# EAGLE board Servo MCU v1.4 (EAGLE 6.4)
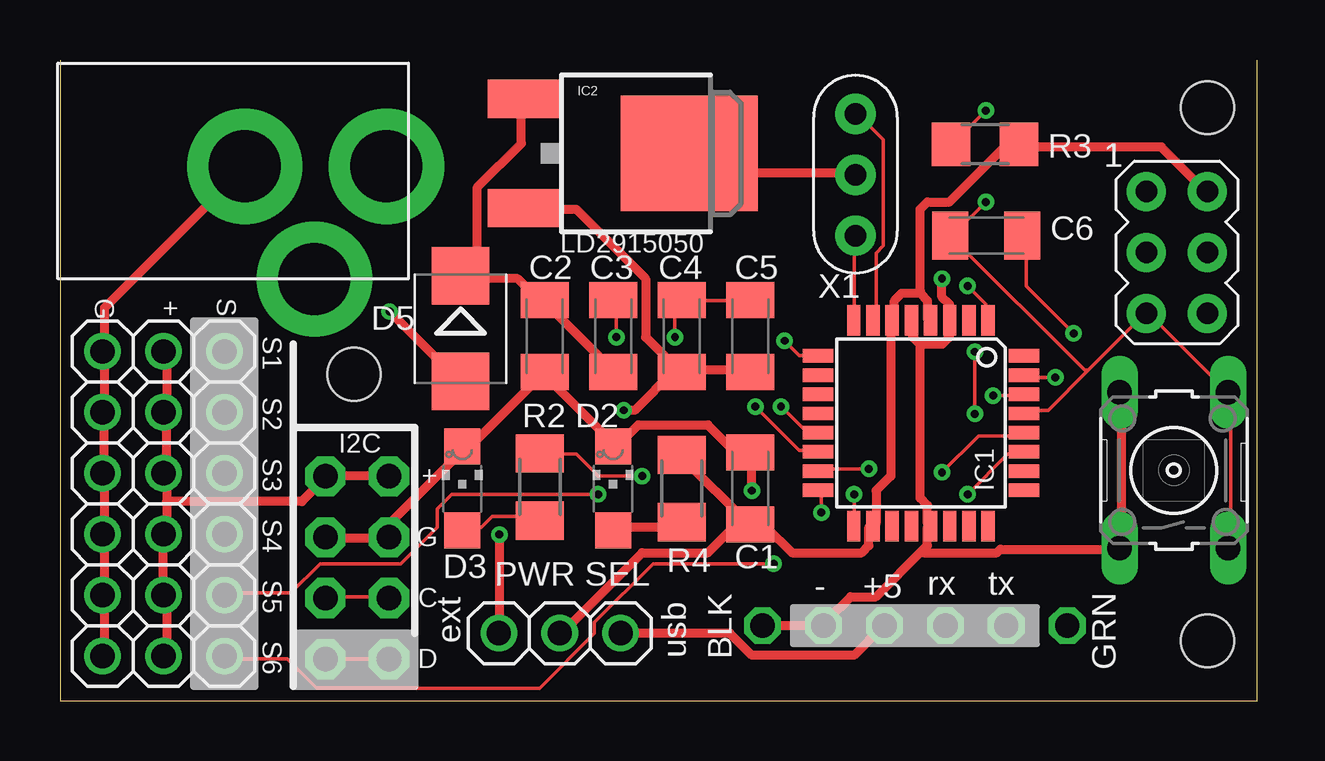
[diagram p0: board, top side]
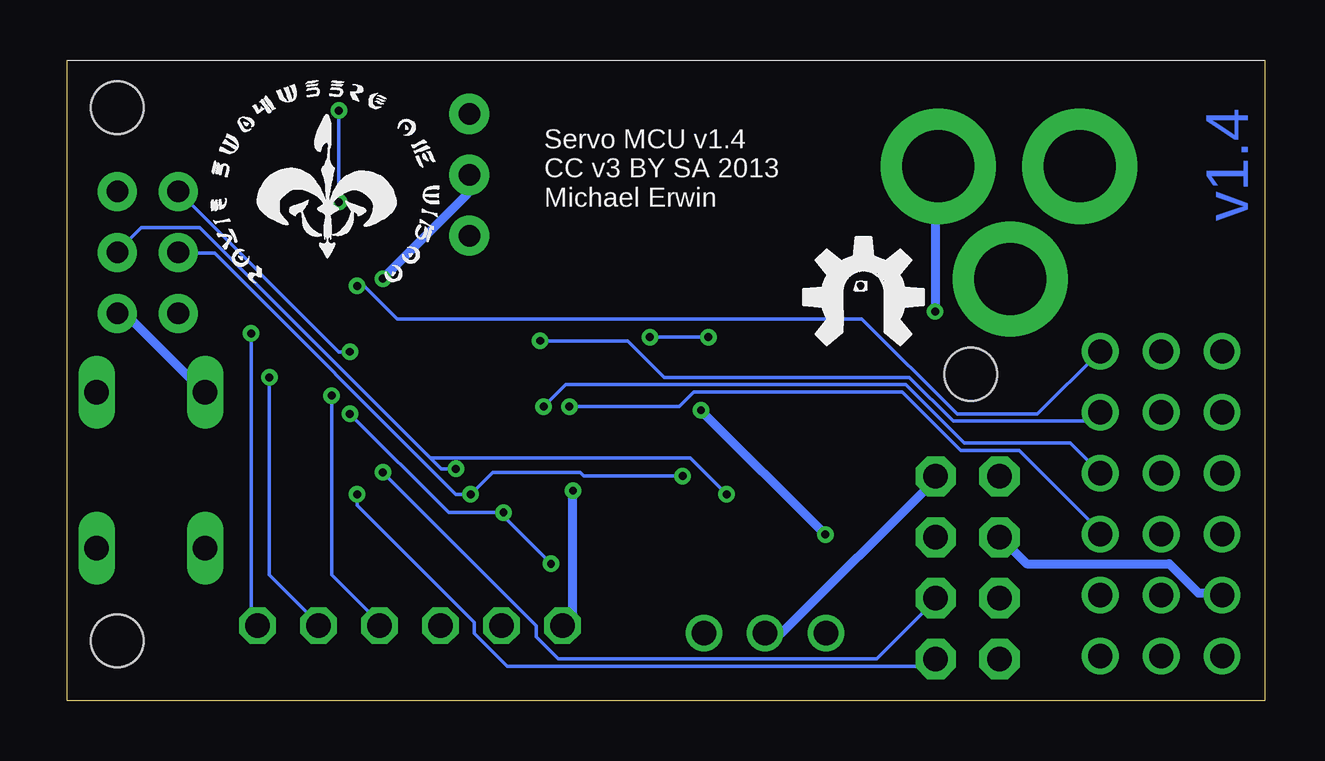
[diagram p1: board, bottom side, seen from below]

Size 49.89 x 26.72 mm. Coordinates in mm from the lower left corner, seen from the top.
Outline: 49.89,26.72 49.89,0 0,0 0,26.72
Copper layers (1*16): Top 0.0356mm / dielectric 1.5011mm / Bottom 0.0356mm
Design rules "LaenPCBOrder *": minimum track width 6mil, minimum drill 13mil, track to track 6mil, track to pad 6mil, pad to pad 6mil, via to via 12mil, smd to smd 6mil, copper to edge 15mil, drill to drill 6mil, minimum pad ring 7mil, minimum via ring 7mil, stop-mask expansion 4mil, vias tented up to drill 14mil, thermal gap 10mil
Net classes: 1 supply: width 0.381 mm, drill 0.152 mm, clearance 0.152 mm
Holes 2.2 mm at 47.81,2.5 47.81,24.73 12.25,13.61

## Footprints (pad centres in the part's own frame; a part is rotated, then mirrored left to right if it is on the bottom)
C1206K = smd 1.5 x 2: 1 -1.5,0; 2 1.5,0
CHIPLED_1206 = smd 1.5 x 1.5: A 0,-1.75; C 0,1.75
SMB = smd 2.4 x 2.4: A 2.2,0; C -2.2,0
1X04-CB = drill 1.016 pad 1.676 octagon: 1 -3.81,0; 2 -1.27,0; 3 1.27,0; 4 3.81,0
TQFP32-08 = smd 1.27 x 0.559: 1 -4.293,2.8; 2 -4.293,2; 3 -4.293,1.2; 4 -4.293,0.4; 5 -4.293,-0.4; 6 -4.293,-1.2; 7 -4.293,-2; 8 -4.293,-2.8; 17 4.293,-2.8; 18 4.293,-2; 19 4.293,-1.2; 20 4.293,-0.4; 21 4.293,0.4; 22 4.293,1.2; 23 4.293,2; 24 4.293,2.8 | smd 0.559 x 1.27: 9 -2.8,-4.293; 10 -2,-4.293; 11 -1.2,-4.293; 12 -0.4,-4.293; 13 0.4,-4.293; 14 1.2,-4.293; 15 2,-4.293; 16 2.8,-4.293; 25 2.8,4.293; 26 2,4.293; 27 1.2,4.293; 28 0.4,4.293; 29 -0.4,4.293; 30 -1.2,4.293; 31 -2,4.293; 32 -2.8,4.293
DPAK = smd 1.6 x 3: 1 -2.28,-5.31; 3 2.28,-5.31 | smd 4.826 x 5.715: 4 0,1.588
AVRISP = drill 0.9 pad 1.626: 1 -1.27,2.54; 2 1.27,2.54; 3 -1.27,0; 4 1.27,0; 5 -1.27,-2.54; 6 1.27,-2.54
PJ-102A = drill 3 pad 4.8: RING 0.1,-3.39; RING_SW -4.6,-6.29; TIP 0.1,-9.29
1X03 = drill 1.016: 1 -2.54,0; 2 0,0; 3 2.54,0
1X06-CLEAN = drill 1.016 octagon: 1 -6.35,0; 2 -3.81,0; 3 -1.27,0; 4 1.27,0; 5 3.81,0; 6 6.35,0
R1206 = smd 1.6 x 1.803: 1 -1.422,0; 2 1.422,0
M1206 = smd 1.6 x 2: 1 -1.4,0; 2 1.4,0
B3F-10XX = drill 1.016 long: 1 -3.251,2.261; 2 3.251,2.261; 3 -3.251,-2.261; 4 3.251,-2.261
CERM_OSC = drill 0.9 pad 1.676: P$1 -2.54,0; P$2 0,0; P$3 2.54,0

## Placement (x,y rotation side)
C1  0.1uF  [C1206K]  28.76,8.85 90 top
C2  0.1uF  [C1206K]  20.19,15.2 270 top
C3  10uf 25V  [C1206K]  23.05,15.2 90 top
C4  10uf 25V  [C1206K]  25.9,15.2 90 top
C5  0.1uF  [C1206K]  28.76,15.2 90 top
C6  0.1uF  [C1206K]  38.6,19.39 180 top
D2  [CHIPLED_1206]  23.05,8.85 0 top
D3  Green  [CHIPLED_1206]  16.76,8.85 0 top
D5  [SMB]  16.7,15.52 270 top
I2C  [1X04-CB]  11.06,5.55 90 top
I2C1  [1X04-CB]  13.71,5.55 90 top
IC1  MEGA48/88/168-AU  [TQFP32-08]  35.87,11.58 270 top
IC2  LM2931_FIXED  [DPAK]  24.63,22.82 270 top
ICSP  AVRISP-6  [AVRISP]  46.54,18.69 0 top
J2  2.1MMJACK  [PJ-102A]  4.31,22.19 90 top
JP1  [1X03]  4.31,14.57 180 top
JP2  [1X03]  4.31,12.03 180 top
JP3  [1X03]  4.31,9.49 180 top
JP4  [1X03]  4.31,6.95 180 top
JP5  [1X03]  4.31,4.41 180 top
JP6  [1X03]  4.31,1.87 180 top
JP7  [1X06-CLEAN]  35.62,3.14 0 top
PWR_SELECT  [1X03]  20.82,2.82 0 top
R1  10K  [R1206]  38.54,23.2 180 top
R3  1.0 K  [M1206]  20,8.92 270 top
R4  1.0 K  [M1206]  25.9,8.85 270 top
S1  RESET  [B3F-10XX]  46.41,9.61 90 top
U$2  RSERIES-OSHW-LOGOMEDIUM  [RSERIES-OSHW-LOGO-MEDIUM]  16.82,16.88 0 bottom
U$3  ROYAL-ENGINEERS-OF-NABOOSMALL  [ROYAL-ENGINEERS-OF-NABOO-SMALL]  44,17.11 0 bottom
X1  16.00MHz  [CERM_OSC]  33.14,21.93 270 top

## Library data of the parts
C1 C2 C5 C6 D2 D3 J2 R3 R4 = minimidi
C3 C4 = rcl
D5 = diode
I2C I2C1 JP7 = carduino
IC1 = avr-7
IC2 = SparkFun-PowerIC
ICSP JP1-JP6 PWR_SELECT = adafruit
R1 = rcl-ez
S1 = switch-omron
U$2 U$3 = rseries
X1 = digg

## Nets
+5V [supply]: C1.1 I2C1.4 I2C.4 IC1.4 IC1.6 IC1.18 ICSP.2 JP1.2 JP2.2 JP3.2 JP4.2 JP5.2 JP6.2 PWR_SELECT.2 R1.1 R4.1
+9V [supply]: C2.1 C3.1 D5.C IC2.1
ANALOG0: IC1.23
ANALOG1: IC1.24
ANALOG2: IC1.25
ANALOG3: IC1.26
ANALOG4: I2C1.1 I2C.1 IC1.27
ANALOG5: I2C1.2 I2C.2 IC1.28
AREF: IC1.20
DIGITAL2: IC1.32
DIGITAL3: IC1.1 JP1.1
DIGITAL4: IC1.2
DIGITAL5: IC1.9 JP2.1
DIGITAL6: IC1.10
DIGITAL7: IC1.11
DIGITAL8: IC1.12
DIGITAL9: IC1.13 JP3.1
DIGITAL10: IC1.14 JP4.1
GND [supply]: C1.2 C2.2 D2.C D3.C I2C1.3 I2C.3 IC1.3 IC1.5 IC1.21 IC2.4 ICSP.6 J2.RING JP1.3 JP2.3 JP3.3 JP4.3 JP5.3 JP6.3 JP7.1 JP7.2 S1.1 S1.2 X1.P$2
MISO: IC1.16 ICSP.1 JP6.1
MOSI: IC1.15 ICSP.4 JP5.1
N$1: IC1.7 X1.P$1
N$2: IC1.8 X1.P$3
N$4: D3.A R3.2
N$5 [supply]: D2.A R4.2
N$6 [supply]: D5.A J2.TIP
N$8: C3.2 C4.2 C5.2
N$9 [supply]: C4.1 C5.1 IC2.3 PWR_SELECT.1
RST: C6.2 IC1.29 ICSP.5 R1.2 S1.3 S1.4
RTS#: C6.1 JP7.6
RXD: IC1.30 JP7.4
SCK: IC1.17 ICSP.3 R3.1
TXD: IC1.31 JP7.5
USB_5V [supply]: JP7.3 PWR_SELECT.3

## Tracks (layer width: path | path; a pad name or v marks a point on that pad's centre or on a via)
+5V
  Top 0.381: JP1.2 4.44,14.55 4.44,12.12 JP2.2 4.44,11.96 4.44,9.53 JP3.2 4.44,9.37 4.44,8.31 | JP6.2 4.44,1.91 4.44,4.34 JP5.2 4.29,4.5 4.29,6.78 JP4.2 4.44,7.09 4.44,8.31 | ICSP.2 47.72,21.26 45.89,23.09 40.1,23.09 R1.1 39.8,23.24 39.49,23.24 37.05,20.8 36.14,20.8 35.83,20.5 35.83,17.15 35.83,16.99 | 35.83,16.99 36.14,16.69 36.14,15.93 IC1.4 | 35.83,16.99 35.07,16.99 34.77,16.69 34.77,15.93 IC1.6 34.62,15.77 34.62,9.37 34.01,8.76 34.01,7.39 IC1.18 33.7,7.24 33.7,6.48 33.4,6.17 30.5,6.17 29.43,7.24 28.82,7.24 C1.1 | C1.1 28.67,7.39 25.93,10.13 R4.1 | I2C1.4 13.58,9.37 11.15,9.37 I2C.4 10.99,9.22 10.08,8.31 4.59,8.31 4.44,8.31 | C1.1 28.37,7.54 26.99,6.17 24.25,6.17 20.9,2.82 PWR_SELECT.2
  Bottom 0.381: PWR_SELECT.2 20.75,2.82 20.14,2.82 13.74,9.22 I2C1.4
+9V
  Top 0.381: C3.1 23.03,13.79 20.14,16.69 C2.1 19.98,16.69 19.07,17.6 16.78,17.6 D5.C 17.39,17.75 17.39,21.41 19.22,23.24 19.22,25.07 IC2.1
ANALOG4  (via drill 0.33)
  Top 0.152: v37.82,8.61 39.49,10.29 40.1,10.29 IC1.27 | I2C.1 11.15,1.75 13.58,1.75 I2C1.1
  Bottom 0.152: v37.82,8.61 37.82,8.15 32.94,3.28 32.94,2.82 31.57,1.45 13.89,1.45 13.74,1.6 I2C1.1
ANALOG5  (via drill 0.33)
  Top 0.152: v36.75,9.53 38.27,11.05 40.1,11.05 IC1.28 | I2C.2 11.15,4.34 13.58,4.34 I2C1.2
  Bottom 0.152: v36.75,9.53 30.35,3.12 30.35,2.67 29.43,1.75 16.17,1.75 13.74,4.19 I2C1.2
DIGITAL3  (via drill 0.33)
  Top 0.152: v37.82,17.3 38.58,16.54 38.58,15.93 IC1.1
  Bottom 0.152: v37.82,17.3 37.51,17.3 36.14,15.93 16.78,15.93 12.82,11.96 9.47,11.96 6.88,14.55 JP1.1
DIGITAL5  (via drill 0.33)
  Top 0.152: v30.2,15.01 30.8,14.4 31.57,14.4 IC1.9
  Bottom 0.152: v30.2,15.01 26.54,15.01 25.01,13.49 14.8,13.49 12.97,11.66 7.18,11.66 6.88,11.96 JP2.1
DIGITAL9  (via drill 0.33)
  Top 0.152: v30.04,12.27 31.11,11.2 31.57,11.2 IC1.13
  Bottom 0.152: v30.04,12.27 29.13,13.18 14.96,13.18 12.52,10.74 8.1,10.74 6.88,9.53 JP3.1
DIGITAL10  (via drill 0.33)
  Top 0.152: v28.98,12.27 30.8,10.44 31.57,10.44 IC1.14
  Bottom 0.152: v28.98,12.27 24.4,12.27 23.79,12.88 15.11,12.88 12.67,10.44 10.23,10.44 6.88,7.09 JP4.1
GND  (via drill 0.33)
  Top 0.381: JP6.3 1.85,1.91 1.85,4.34 JP5.3 1.85,4.5 1.85,6.78 JP4.3 1.85,7.09 1.85,9.37 JP3.3 1.85,9.53 1.85,11.96 JP2.3 1.85,12.12 1.85,14.55 JP1.3 1.85,14.71 1.85,16.38 7.64,22.17 J2.RING | I2C.3 11.15,6.78 13.58,6.78 I2C1.3 13.74,6.93 13.74,7.39 16.78,10.44 D3.C 16.78,10.74 17.24,10.74 20.14,13.64 | 20.14,13.64 C2.2 20.14,13.64 | 20.14,13.64 23.03,10.74 D2.C 23.18,10.59 24.1,11.51 26.99,11.51 28.06,10.44 28.67,10.44 C1.2 28.82,10.29 v28.82,8.76 | S1.2 44.22,12.73 44.22,6.48 S1.1 44.06,6.32 39.19,6.32 39.04,6.17 35.99,6.17 35.91,6.25 | X1.P$2 33.09,22.02 26.99,22.02 26.23,22.78 IC2.4 | IC1.5 35.53,15.93 IC1.5 | 35.83,14.86 35.53,15.16 35.53,15.77 IC1.5 | 35.83,14.86 36.75,14.86 37.05,15.16 37.05,15.77 IC1.3 | IC1.3 37.05,15.93 IC1.3 | 35.91,6.25 34.01,4.34 32.94,4.34 31.87,3.28 JP7.2 31.72,3.12 29.28,3.12 JP7.1 | 35.91,6.25 36.14,6.48 36.14,7.24 IC1.21 36.14,7.39 36.14,8.15 35.83,8.46 35.83,14.71 35.83,14.86 | v36.75,17.6 36.75,16.84 37.05,16.54 37.05,16.08 IC1.3 | 47.87,16.23 ICSP.6 47.87,16.23
  Bottom 0.381: ICSP.6 47.72,16.08 47.42,16.08 44.22,12.88 S1.2 | v36.75,17.6 33.24,21.11 33.24,21.87 X1.P$2 | v28.82,8.76 28.82,3.58 29.13,3.28 JP7.1 | JP5.3 1.85,4.5 2.76,4.5 3.98,5.72 9.93,5.72 10.99,6.78 I2C.3
MISO  (via drill 0.33)
  Top 0.152: v31.72,7.85 31.72,8.76 IC1.16 | v38.12,14.55 v38.12,11.96 | v29.74,5.72 24.71,5.72 22.27,3.28 22.27,2.82 19.98,0.53 10.69,0.53 9.47,1.75 6.88,1.75 JP6.1
  Bottom 0.152: 31.87,7.85 34.01,7.85 v38.12,11.96 | 31.87,7.85 v31.72,7.85 31.87,7.85 | v38.12,14.55 38.58,14.55 45.13,21.11 ICSP.1 | 31.87,7.85 v29.74,5.72
MOSI  (via drill 0.33)
  Top 0.152: v33.7,9.68 31.72,9.68 IC1.15 | v22.42,8.61 16.33,8.61 15.72,8 15.72,7.24 14.19,5.72 10.84,5.72 9.62,4.5 6.88,4.5 JP5.1
  Bottom 0.152: v33.7,9.68 34.31,9.68 34.77,10.13 | 34.77,10.13 44.37,19.74 46.81,19.74 47.72,18.82 ICSP.4 | v22.42,8.61 23.95,10.13 34.77,10.13
N$1
  Top 0.152: IC1.7 34.01,15.93 34.01,18.67 34.31,18.97 34.31,23.39 33.24,24.46 X1.P$1
N$2
  Top 0.152: IC1.8 33.09,15.93 33.09,19.28 X1.P$3
N$4
  Top 0.152: D3.A 16.78,7.24 17.55,7.24 18,7.7 19.83,7.7 19.98,7.54 R3.2
N$5
  Top 0.381: D2.A 23.18,7.24 25.62,7.24 25.78,7.39 R4.2
N$6  (via drill 0.33)
  Top 0.381: v13.74,16.23 16.63,13.34 D5.A
  Bottom 0.381: v13.74,16.23 13.74,22.17 J2.TIP
N$8  (via drill 0.33)
  Top 0.152: v23.18,15.16 23.18,16.69 C3.2 | v25.62,15.16 25.62,16.54 25.78,16.69 C4.2 25.93,16.69 28.67,16.69 C5.2
  Bottom 0.152: v25.62,15.16 v23.18,15.16
N$9  (via drill 0.33)
  Top 0.381: C4.1 25.93,13.79 28.67,13.79 C5.1 | C4.1 25.78,13.79 24.4,15.16 24.4,17.6 21.51,20.5 19.38,20.5 IC2.3 | v18.31,6.93 18.31,2.82 PWR_SELECT.1 | v23.49,12.12 23.95,12.12 25.62,13.79 C4.1
  Bottom 0.381: v23.49,12.12 v18.31,6.93
RST  (via drill 0.33)
  Top 0.152: S1.3 48.79,6.48 48.79,12.73 S1.4 48.64,12.88 45.28,16.23 ICSP.5 45.13,16.08 42.84,13.79 | v38.58,24.61 37.21,23.24 R1.2 | v38.58,20.8 37.21,19.43 C6.2 37.21,19.28 42.69,13.79 42.84,13.79 | 42.84,13.79 41.17,12.12 40.25,12.12 IC1.29
  Bottom 0.152: v38.58,20.8 v38.58,24.61
RTS#  (via drill 0.33)
  Top 0.152: v42.23,15.32 40.25,17.3 40.25,19.28 C6.1
  Bottom 0.152: v42.23,15.32 42.23,3.43 42.08,3.28 JP7.6
RXD  (via drill 0.33)
  Top 0.152: v38.88,12.73 40.1,12.73 IC1.30
  Bottom 0.152: v38.88,12.73 38.88,5.26 36.9,3.28 JP7.4
SCK  (via drill 0.33)
  Top 0.152: v33.09,8.61 33.09,7.39 IC1.17 | v24.25,9.37 22.42,9.37 21.51,10.29 20.14,10.29 R3.1
  Bottom 0.152: ICSP.3 45.13,18.67 43.76,18.67 33.7,8.61 v33.09,8.61 32.18,9.53 28.52,9.53 28.37,9.37 v24.25,9.37
TXD  (via drill 0.33)
  Top 0.152: v41.47,13.49 40.25,13.49 IC1.31
  Bottom 0.152: v41.47,13.49 41.47,5.26 39.49,3.28 JP7.5
USB_5V
  Top 0.381: PWR_SELECT.3 23.49,2.82 27.91,2.82 28.82,1.91 33.09,1.91 34.31,3.12 JP7.3

## Text on the board
Bottom: v1.4
tPlace: R3 | X1 | R2 | D3 | PWR SEL | GRN | ext | BLK | - | +5 | rx | tx | usb
_tsilk: LD2915050 | C6 | G | + | S | S1 | S2 | S3 | + | S4 | G | S5 | C | S6 | D
_bsilk: Servo MCU v1.4 / CC v3 BY SA 2013 / Michael Erwin